# EAGLE board CDCE9XX_2 (EAGLE 7.5.0)
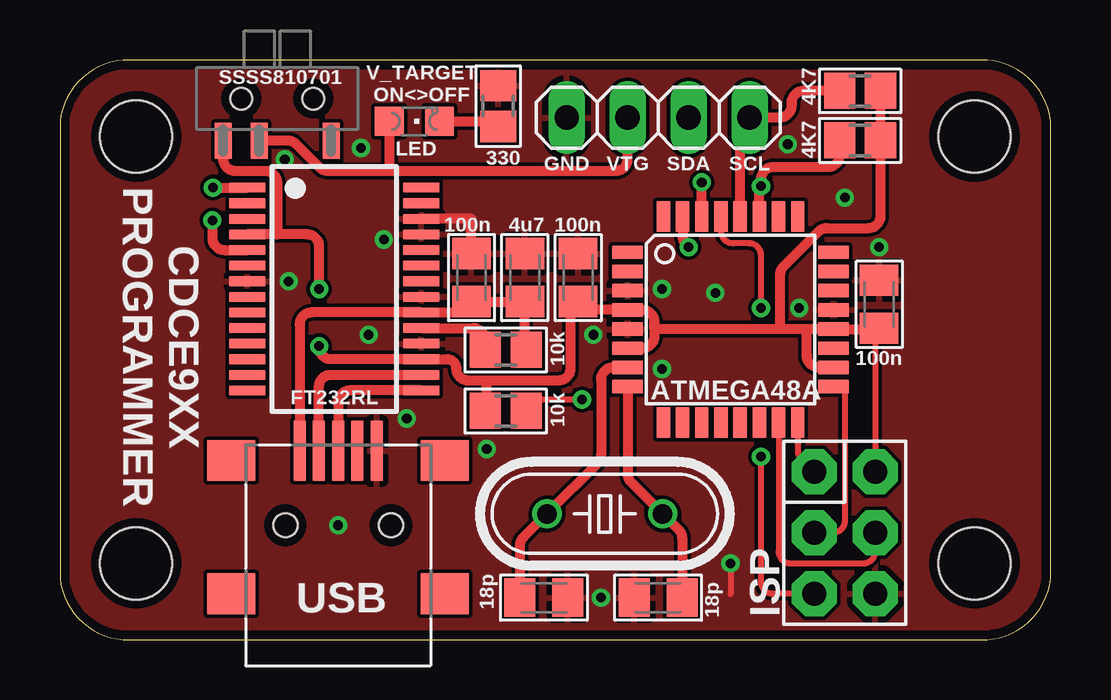
[diagram p0: board, top side]
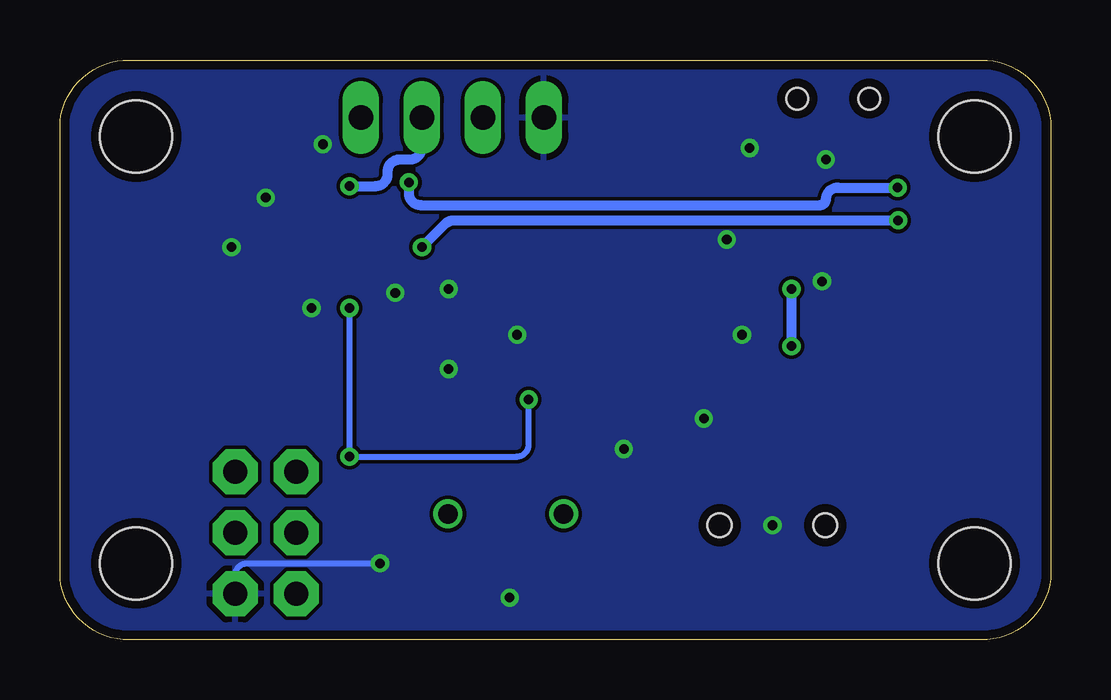
[diagram p1: board, bottom side, seen from below]

Size 41.27 x 24.16 mm. Coordinates in mm from the lower left corner, seen from the top.
Outline: 3.17,0.02 38.1,0.02 arc90 41.27,2.56 41.27,21.61 arc90 38.1,24.15 3.17,24.15 arc90 0,21.61 0,2.56 arc90 3.17,0.02
Copper layers (1*16): Top 0.0356mm / dielectric 1.5011mm / Bottom 0.0356mm
Design rules "OSHPARK": minimum track width 6mil, minimum drill 13mil, track to track 6mil, track to pad 6mil, pad to pad 6mil, via to via 6mil, smd to smd 6mil, copper to edge 15mil, drill to drill 6mil, minimum pad ring 7mil, minimum via ring 7mil, stop-mask expansion 3mil, vias tented up to drill 0mil, thermal gap 10mil
Holes 3 mm at 3.17,3.19 3.17,20.97 38.1,20.97 38.1,3.19

## Footprints (pad centres in the part's own frame; a part is rotated, then mirrored left to right if it is on the bottom)
C0805K_B = smd 1.3 x 1.6: 1 -1,0; 2 1,0
SSOP28 = smd 0.4 x 1.5: 1 -4.225,-3.625; 2 -3.575,-3.625; 3 -2.925,-3.625; 4 -2.275,-3.625; 5 -1.625,-3.625; 6 -0.975,-3.625; 7 -0.325,-3.625; 8 0.325,-3.625; 9 0.975,-3.625; 10 1.625,-3.625; 11 2.275,-3.625; 12 2.925,-3.625; 13 3.575,-3.625; 14 4.225,-3.625; 15 4.225,3.625; 16 3.575,3.625; 17 2.925,3.625; 18 2.275,3.625; 19 1.625,3.625; 20 0.975,3.625; 21 0.325,3.625; 22 -0.325,3.625; 23 -0.975,3.625; 24 -1.625,3.625; 25 -2.275,3.625; 26 -2.925,3.625; 27 -3.575,3.625; 28 -4.225,3.625
TQFP32-08 = smd 1.27 x 0.559: 1 -4.293,2.8; 2 -4.293,2; 3 -4.293,1.2; 4 -4.293,0.4; 5 -4.293,-0.4; 6 -4.293,-1.2; 7 -4.293,-2; 8 -4.293,-2.8; 17 4.293,-2.8; 18 4.293,-2; 19 4.293,-1.2; 20 4.293,-0.4; 21 4.293,0.4; 22 4.293,1.2; 23 4.293,2; 24 4.293,2.8 | smd 0.559 x 1.27: 9 -2.8,-4.293; 10 -2,-4.293; 11 -1.2,-4.293; 12 -0.4,-4.293; 13 0.4,-4.293; 14 1.2,-4.293; 15 2,-4.293; 16 2.8,-4.293; 25 2.8,4.293; 26 2,4.293; 27 1.2,4.293; 28 0.4,4.293; 29 -0.4,4.293; 30 -1.2,4.293; 31 -2,4.293; 32 -2.8,4.293
1X04 = drill 1.016 long: 1 -3.81,0; 2 -1.27,0; 3 1.27,0; 4 3.81,0
CHIPLED_0805 = smd 1.2 x 1.2: A 0,-1.05; C 0,1.05
HC49/S = drill 0.813: 1 -2.413,0; 2 2.413,0
R0805_B = smd 1.3 x 1.5: 1 -0.85,0; 2 0.85,0
2X3_ISP_BIGPOGO = drill 1 pad 1.88 octagon: GND 2.54,1.27; MISO -2.54,-1.27; MOSI 0,1.27; RESET 2.54,-1.27; SCK 0,-1.27; VCC -2.54,1.27
SSSS810701 = smd 0.7 x 1.5: T1 -2.25,1.75; T2 0.75,1.75; T3 2.25,1.75 | hole 0.9: -1.5,0; 1.5,0
LUM2486-01 = smd 0.5 x 2.5: 1VBUS -1.6,3.1; 2D- -0.8,3.1; 3D+ 0,3.1; 4ID 0.8,3.1; 5GND 1.6,3.1 | smd 2 x 1.7: P$1 -4.45,2.7; P$2 4.45,2.7; P$3 4.45,-2.85; P$4 -4.45,-2.85 | hole 1: 2.2,0; -2.2,0

## Placement (x,y rotation side)
C1  100n  [C0805K_B]  17.14,15.1 270 top
C2  4u7  [C0805K_B]  19.37,15.1 270 top
C3  18p  [C0805K_B]  20.16,1.76 180 top
C4  18p  [C0805K_B]  24.92,1.76 0 top
C5  100n  [C0805K_B]  21.59,15.1 270 top
C6  100n  [C0805K_B]  34.13,13.99 270 top
IC1  FT232RL  [SSOP28]  11.43,14.62 270 top
IC2  ATMEGA48A  [TQFP32-08]  27.94,13.35 0 top
JP1  [1X04]  24.92,21.77 0 top
LED  [CHIPLED_0805]  14.76,21.61 270 top
Q1  10M  [HC49/S]  22.7,5.26 180 top
R1  10k  [R0805_B]  18.57,9.54 0 top
R2  10k  [R0805_B]  18.57,12.08 0 top
R3  4K7  [R0805_B]  33.34,20.81 0 top
R4  4K7  [R0805_B]  33.34,22.88 0 top
R5  330  [R0805_B]  18.26,22.24 90 top
U$2  ISPBIG_POGO_PINS  [2X3_ISP_BIGPOGO]  32.7,4.46 270 top
U$3  TOGGLE_SWITCH  [SSSS810701]  9.05,22.56 180 top
USB1  LUMBERG2486_01_MINI_USB_B  [LUM2486-01]  11.59,4.78 0 top

## Library data of the parts
C1-C6 R1-R5 = resistor
IC1 = ftdichip; MPN: FT232RL; OC_FARNELL: 1146032; OC_NEWARK: 91K9918
IC2 = atmel; MPN: ATMEGA8-16AU; OC_FARNELL: 9171371; OC_NEWARK: 73M8863
JP1 = pinhead (2)
LED = led
Q1 = crystal; OC_FARNELL: 1667008; OC_NEWARK: unknown
U$2 U$3 USB1 = schnaustlib

## Nets
!RESET: IC2.29 R1.2 U$2.RESET
+3V3: C5.2 C6.2 IC1.4 IC1.17 IC2.4 IC2.6 IC2.18 IC2.20 R1.1 R3.2 R4.2 U$2.VCC U$3.T3
FT_RX: IC1.5 IC2.31
FT_TX: IC1.1 IC2.30
GND: C1.1 C2.1 C3.1 C4.1 C5.1 C6.1 IC1.7 IC1.18 IC1.21 IC1.25 IC1.26 IC2.3 IC2.5 IC2.21 JP1.1 R5.2 U$2.GND USB1.5GND
N$1: LED.C R5.1
N$3: C1.2 C2.2 IC1.20 R2.2 USB1.1VBUS
N$4: IC1.19 R2.1
N$7: C3.2 IC2.7 Q1.2
N$8: C4.2 IC2.8 Q1.1
N$9: IC2.16 U$2.MISO
N$14: IC2.17 U$2.SCK
N$15: IC2.15 U$2.MOSI
SCL: IC2.28 JP1.4 R4.1
SDA: IC2.27 JP1.3 R3.1
USB+: IC1.15 USB1.3D+
USB-: IC1.16 USB1.2D-
V_TARGET: JP1.2 LED.A U$3.T2

## Tracks (layer width: path | path; a pad name or v marks a point on that pad's centre or on a via)
!RESET  (via drill 0.4)
  Top 0.254: U$2.RESET 29.71,1.92 arc-90 29.21,2.42 v29.21,7.64 | v29.21,13.83 29.21,16.03 arc90 28.71,16.53 28.04,16.53 arc-90 27.54,17.03 IC2.29 | v21.75,10.02 19.42,10.02 R1.2
  Top 0.406: 19.53,9.44 R1.2
  Bottom 0.254: v29.21,13.83 v29.21,7.64 22.25,7.64 arc-90 21.75,8.14 v21.75,10.02
+3V3  (via drill 0.4)
  Top 0.254: 33.77,12.62 33.97,12.62 U$2.VCC
  Top 0.406: C6.2 arc-90 33.77,12.62 33.44,12.95 IC2.20 31.11,12.95 | 24.77,12.95 24.77,12.65 arc-90 24.27,12.15 IC2.6 | IC2.18 31.61,11.35 arc-90 31.11,11.85 31.11,12.95 | v10.79,12.24 10.79,12.2 arc90 11.29,11.7 IC1.17 16.12,11.7 arc-90 16.51,11.31 arc90 17.01,10.81 17.78,10.81 | v10.79,14.62 10.79,16.4 arc90 10.29,16.9 9.05,16.9 | 9.05,16.9 IC1.4 | 17.78,10.81 20.77,10.81 arc90 21.27,11.31 21.27,13.78 C5.2 21.94,13.75 IC2.4 24.27,13.75 arc-90 24.77,13.25 24.77,12.95 | R1.1 17.78,9.54 17.78,10.81 | U$3.T3 6.8,20.04 arc90 7.3,19.54 8.55,19.54 arc-90 9.05,19.04 9.05,16.9 | 30,12.95 24.77,12.95 | 31.11,12.95 30,12.95 | 30,12.95 30,15.21 arc-45 30.15,15.56 31.6,17.02 arc-45 31.96,17.16 33.69,17.16 arc90 34.19,17.66 R3.2 R4.2
  Bottom 0.406: v10.79,12.24 v10.79,14.62
FT_RX  (via drill 0.4)
  Top 0.406: v6.35,17.48 6.35,16.75 arc90 6.85,16.25 IC1.5 | IC2.31 25.94,16.83 arc45 26.09,16.48 v26.19,16.37
  Bottom 0.406: v26.19,16.37 25.23,17.33 arc45 24.88,17.48 v6.35,17.48
FT_TX  (via drill 0.4)
  Top 0.406: v6.38,18.85 IC1.1 | IC2.30 v26.74,19.07
  Bottom 0.406: v26.74,19.07 26.74,18.62 arc-90 26.24,18.12 9.6,18.12 arc-90 9.37,18.35 arc90 8.87,18.85 v6.38,18.85
GND  (via drill 0.4)
  Top 0.254: v27.94,3.19 27.94,1.92
  Top 0.406: C1.1 17.14,17.55 IC1.26
  Bottom 0.254: U$2.GND 33.97,2.69 arc90 33.47,3.19 v27.94,3.19
  other vias: 12.86,12.72 9.53,14.94 12.54,20.5 14.45,9.22 11.59,4.78 30.8,13.83 22.54,1.76 25.08,14.62 27.3,14.46 22.23,12.72 17.78,7.95 13.49,16.69 9.37,20.02 25.08,11.29 34.13,16.37 32.7,18.43 30.32,20.65
  pour Top: 0,24.15 41.27,24.15 41.27,0.02 0,0.02
  pour Bottom: 0,24.15 41.27,24.15 41.27,0.02 0,0.02
N$1
  Top 0.406: LED.C 18.26,21.61 R5.1
N$3
  Top 0.406: USB1.1VBUS 9.99,13.15 arc-90 10.49,13.65 IC1.20 17.01,13.65 C1.2 C2.2 19.37,12.08 R2.2
N$4
  Top 0.406: IC1.19 17.22,13 arc-90 17.72,12.5 R2.1
N$7
  Top 0.406: IC2.7 23.04,11.35 arc90 22.54,10.85 22.54,7.72 arc-45 22.4,7.36 Q1.2 19.31,4.28 arc45 19.16,3.92 C3.2
N$8
  Top 0.406: IC2.8 23.65,6.93 arc45 23.79,6.58 Q1.1 25.78,4.59 arc-45 25.92,4.24 C4.2
N$9
  Top 0.254: IC2.16 30.74,7.9 arc45 30.89,7.55 U$2.MISO
N$14
  Top 0.254: U$2.SCK 32.2,4.46 arc90 32.7,4.96 32.7,10.55 IC2.17
N$15
  Top 0.254: IC2.15 29.94,3.69 arc90 30.44,3.19 33.47,3.19 arc90 33.97,3.69 U$2.MOSI
SCL
  Top 0.406: IC2.28 28.34,21.17 arc-45 28.49,21.52 JP1.4 29.98,21.77 arc90 30.48,22.27 30.48,22.38 arc-90 30.98,22.88 R4.1
SDA  (via drill 0.4)
  Top 0.406: R3.1 32.49,20.2 arc-90 31.99,19.7 29.71,19.7 arc90 29.21,19.2 v29.21,18.91 arc45 29.14,18.74 IC2.27
  Bottom 0.406: v29.21,18.91 28.12,18.91 arc-90 27.62,19.41 27.62,19.52 arc90 27.12,20.02 26.69,20.02 arc-90 26.19,20.52 JP1.3
USB+
  Top 0.406: IC1.15 12.09,10.4 arc90 11.59,9.9 USB1.3D+
USB-
  Top 0.406: USB1.2D- 10.79,10.55 arc-90 11.29,11.05 IC1.16
V_TARGET
  Top 0.406: 13.71,19.54 11.16,19.54 arc-45 10.81,19.69 9.83,20.66 arc45 9.48,20.81 U$3.T2 | 13.71,19.54 23.15,19.54 arc90 23.65,20.04 JP1.2 | LED.A 13.71,19.54

## Text on the board
tPlace: SSSS810701 | V_TARGET / ON<>OFF | GND | VTG | SDA | SCL | CDCE9XX / PROGRAMMER | ISP | USB